# Altium PCB PCB.PcbDoc_2022-03-31.pcbdoc
Units mil, origin at the board's own origin, x right, y up, seen from the top; angles counter-clockwise.
Board outline 1916 x 2710 mil, 2 copper layers (Top Layer, Bottom Layer); 26 components, 38 nets, 144 pads, 24 vias.
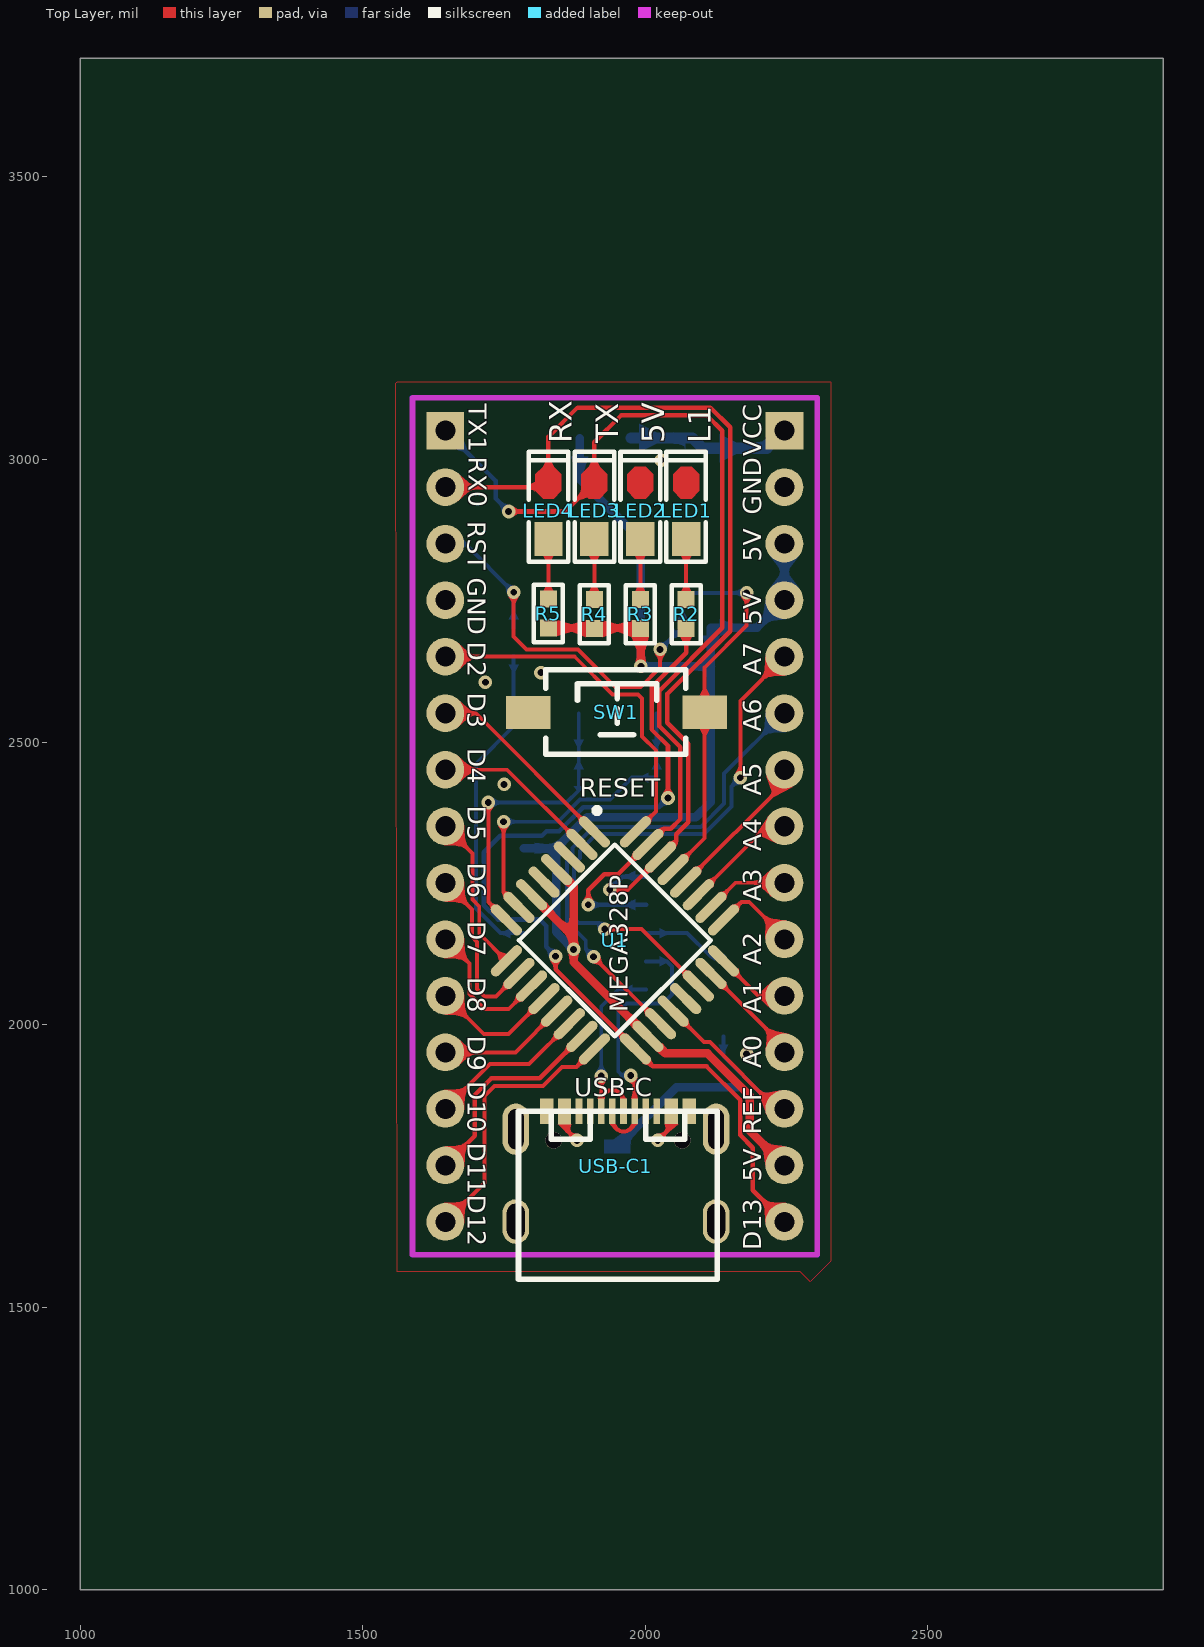
[diagram p0: Top Layer view]
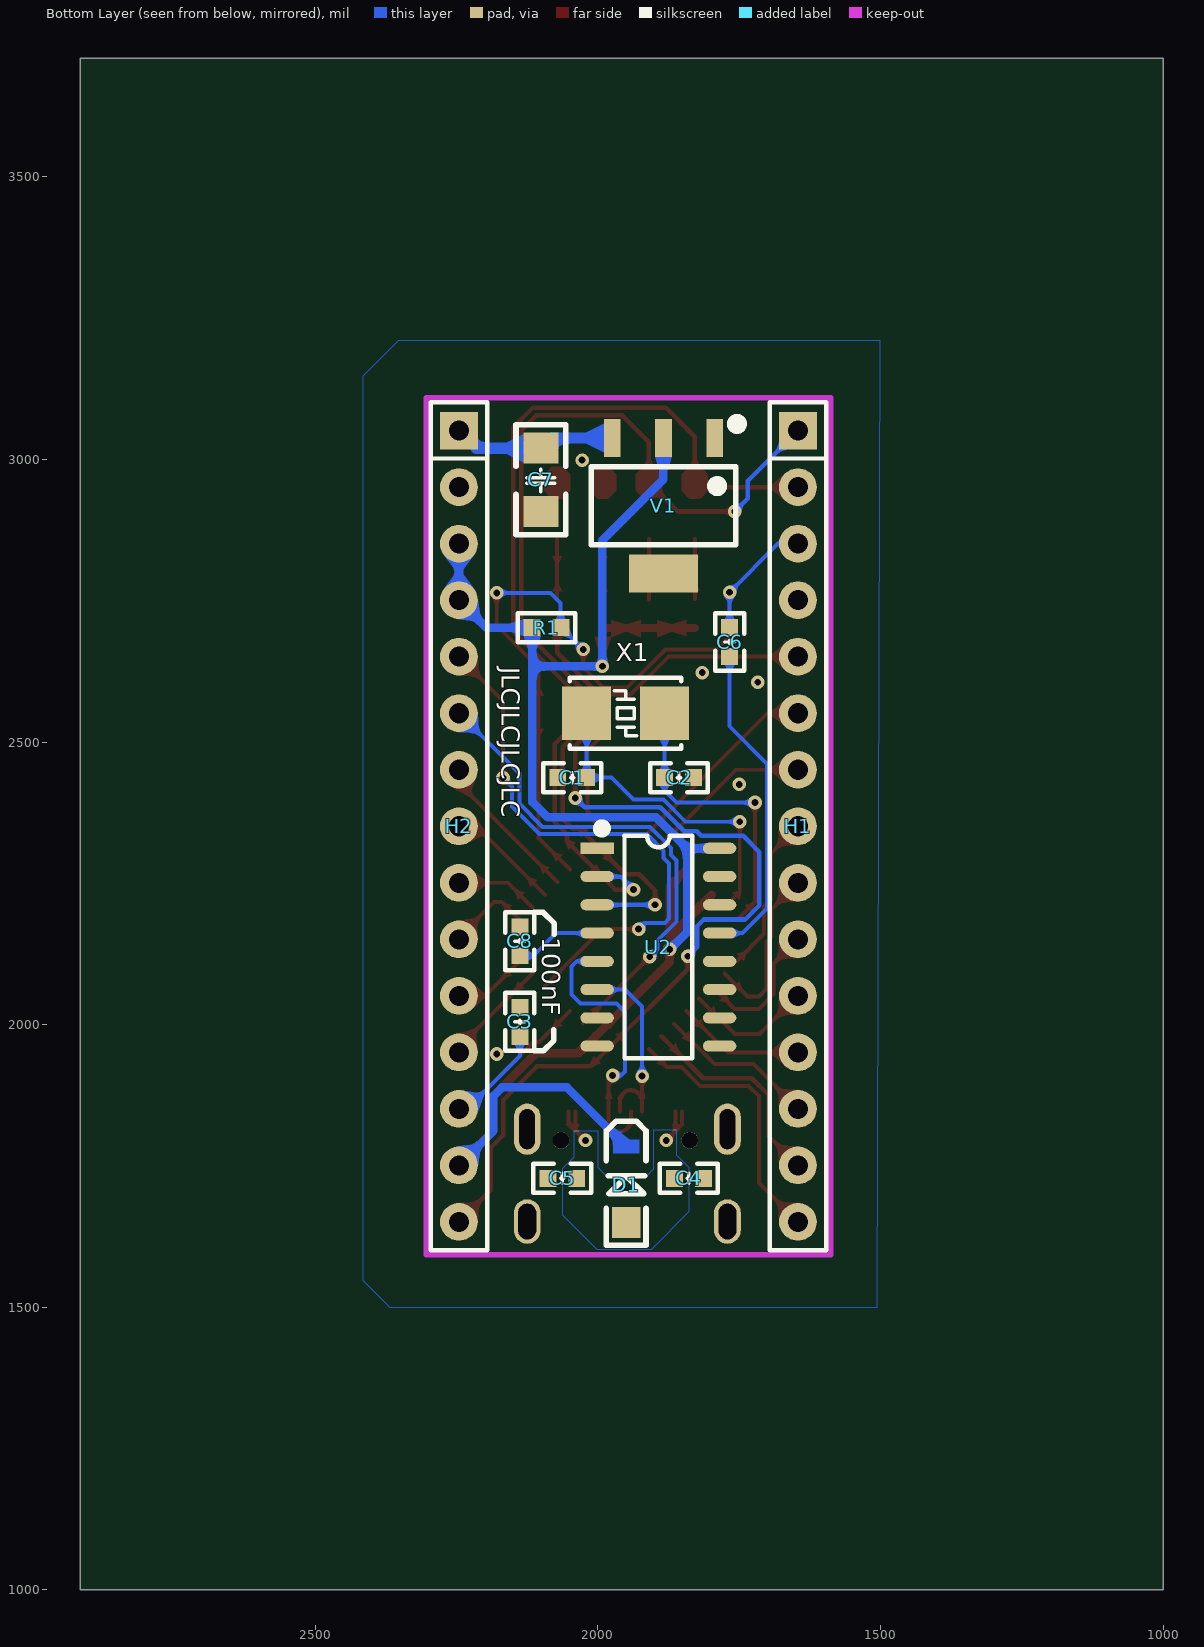
[diagram p1: Bottom Layer view, seen from below]

## Layer stack, top to bottom
Top Layer: signal copper (thickness not stored)
Dielectric: dielectric 12.6, FR-4, Dk 4.8
Bottom Layer: signal copper (thickness not stored)

## Board outline
2916,1000 1000,1000 1000,3710 2916,3710

## Components (designator, comment, footprint, x,y, rotation, side; value= is the part's Value field where it differs from the comment)
C1 "22pF" "C 0603_L" 2045.49,2437 r180 bottom
C2 "22pF" "C 0603_L" 1856.51,2436.99 r0 bottom
C3 "100nF" "C 0603_L" 2138.16,2004.84 r270 bottom
C4 "0.1uF" "C 0603_L" 1839,1728 r0 bottom
C5 "4.7uF" "C 0603_L" 2063,1728 r180 bottom
C6 "100nF" "C 0603_L" 1767,2677 r270 bottom
C7 "10uF" "C 1206_L" 2101,2963 r90 bottom
C8 "100nF" "C 0603_L" 2138.16,2147.43 r270 bottom
D1 "SS26" SOD-123 1950,1717 r90 bottom
H1 "HEADER 1X15" HDR2.54-LI-15P 1646,2351 r270 bottom
H2 "HEADER 1X15" HDR2.54-LI-15P 2246,2351 r270 bottom
LED1 "LED-RED" "LED 0805" 2072.24,2909 r90 top
LED2 "LED-RED" "LED 0805" 1990.98,2909 r90 top
LED3 "LED-BLUE" "LED 0805B" 1909.72,2909 r90 top
LED4 "LED-YELLOW" "LED 0805Y" 1828.46,2909 r90 top
R1 "1K" "R 0603_L" 2091,2702.6 r0 bottom
R2 "1K" "R 0603_L" 2072.24,2726.41 r270 top
R3 "1K" "R 0603_L" 1990.98,2726.41 r270 top
R4 "1K" "R 0603_L" 1909.72,2726.41 r270 top
R5 "1K" "R 0603_L" 1828.46,2727.41 r270 top
SW1 "3x6x5" "TSW SMD-3*6*2.5" 1950,2553 r0 top
U1 "MEGA328P" TQFP32-7*7 1946,2149 r225 top
U2 "CH340C" SOP16_L 1893,2137 r180 bottom
USB-C1 "USB-C" TYPE-C-USB-5 1948,1749 r0 top
V1 "AMS1117-5V" AMS1117 1884,2918 r0 bottom
X1 "16MHz" "OSC 5032-2P" 1951,2551 r0 bottom

## Footprints (in the part's own frame and the unit in brackets; to place one, negate y for a bottom-side part, rotate by r counter-clockwise, add the part's x,y. Pads: shape width x height; smd on the part's side, far side on the other; paste and mask are expansions set on the pad)
AMS1117 [mm]
  rect 0.75x1.7 smd: 1(-2.3,-3.048) 2(0,-3.048) 3(2.3,-3.048)
  rect 3.1x1.7 smd: 4(0,3.048)
  silkscreen extent -3.5,-3.88 3.25,1.75
"C 0603_L" [mil]
  rect 30x30 smd: 1(-25.6,0) 2(25.59,0)
  silkscreen extent -51,-26 51,26
"C 1206_L" [mil]
  rect 55x62 smd: 1(-55.12,0) 2(57.09,0)
  silkscreen extent -96,-44 98,44
HDR2.54-LI-15P [mm]
  rect 1.7x1.7 hole 0.9: 1(-17.78,0)
  round 1.7 hole 0.9: 2(-15.24,0) 3(-12.7,0) 4(-10.16,0) 5(-7.62,0) 6(-5.08,0) 7(-2.54,0) 8(0,0) 9(2.54,0) 10(5.08,0) 11(7.62,0) 12(10.16,0) 13(12.7,0) 14(15.24,0) 15(17.78,0)
  silkscreen extent -19.05,-1.27 19.05,1.27
"LED 0805" [mil]
  rect 60x50 smd: 1(-50,0)
  round 0 smd: 2(50,0)
  Top Layer region: 35.43,23.1 21.9,9.57 21.9,-9.57 35.43,-23.1 64.57,-23.1 78.1,-9.57 78.1,9.57 64.57,23.1
  silkscreen extent -90,-35 105,35
"LED 0805B" [mil]
  rect 60x50 smd: 1(-50,0)
  round 0 smd: 2(50,0)
  Top Layer region: 35.43,23.1 21.9,9.57 21.9,-9.57 35.43,-23.1 64.57,-23.1 78.1,-9.57 78.1,9.57 64.57,23.1
  silkscreen extent -90,-35 105,35
"LED 0805Y" [mil]
  rect 60x50 smd: 1(-50,0)
  round 0 smd: 2(50,0)
  Top Layer region: 35.43,23.1 21.9,9.57 21.9,-9.57 35.43,-23.1 64.57,-23.1 78.1,-9.57 78.1,9.57 64.57,23.1
  silkscreen extent -90,-35 105,35
"OSC 5032-2P" [mm]
  rect 2.2x2.4 smd: 1(-1.75,0) 2(1.75,0)
  silkscreen extent -2.5,-1.6 2.5,1.6
"R 0603_L" [mil]
  rect 30x30 smd: 1(-25.6,0) 2(25.58,0)
  silkscreen extent -51,-26 51,26
SOD-123 [mil]
  rect 55x50 smd: 1(-67.5,0)
  round 0 smd: 2(67.5,0)
  Top Layer region: 55.43,-23.1 55.43,23.1 79.57,23.1 79.57,-23.1
  silkscreen extent -108,-35 112,35
SOP16_L [mm]
  rect 1.5x0.5 smd: 1(-2.752,4.445)
  oval 1.5x0.5 smd: 2(-2.752,3.175) 3(-2.752,1.905) 4(-2.752,0.635) 5(-2.752,-0.635) 6(-2.752,-1.905) 7(-2.752,-3.175) 8(-2.752,-4.445) 9(2.752,-4.445) 10(2.752,-3.175) 11(2.752,-1.905) 12(2.752,-0.635) 13(2.752,0.635) 14(2.752,1.905) 15(2.752,3.175) 16(2.752,4.445)
  silkscreen extent -2.69,-5 1.52,5.49
TQFP32-7*7 [mm]
  oval 0.45x1.8 smd: 1(-2.803,-4.1) 2(-2.003,-4.1) 3(-1.203,-4.1) 4(-0.403,-4.1) 5(0.397,-4.1) 6(1.197,-4.1) 7(1.997,-4.1) 8(2.797,-4.1) 17(2.797,4.1) 18(1.997,4.1) 19(1.197,4.1) 20(0.397,4.1) 21(-0.403,4.1) 22(-1.203,4.1) 23(-2.003,4.1) 24(-2.803,4.1)
  oval 1.8x0.45 smd: 9(4.097,-2.8) 10(4.097,-2) 11(4.097,-1.2) 12(4.097,-0.4) 13(4.097,0.4) 14(4.097,1.2) 15(4.097,2) 16(4.097,2.8) 25(-4.103,2.8) 26(-4.103,2) 27(-4.103,1.2) 28(-4.103,0.4) 29(-4.103,-0.4) 30(-4.103,-1.2) 31(-4.103,-2) 32(-4.103,-2.8)
  silkscreen extent -3.68,-4.82 3.05,3.05
"TSW SMD-3*6*2.5" [mm]
  rect 2x1.5 smd: 1(-3.996,-0.02) 2(3.937,0)
  silkscreen extent -3.21,-1.9 3.09,1.9
TYPE-C-USB-5 [mm]
  oval 1.2x2 hole 0.8 slot 1.6 at 90 deg: 0(-4.5,-2.475) 0(4.5,-2.475)
  oval 1.2x2.3 hole 0.7 slot 1.8 at 90 deg: 0(-4.5,1.675) 0(4.5,1.675)
  rect 0.3x1.15 smd: A1(-3.263,2.473) A4(-2.462,2.471) A5(-1.162,2.475) A6(-0.162,2.475) A7(0.337,2.473) A8(1.337,2.475) A9(2.638,2.475) A12(3.437,2.475) B1(3.138,2.475) B4(2.337,2.475) B5(1.838,2.475) B6(0.838,2.475) B7(-0.663,2.473) B8(-1.663,2.475) B9(-2.162,2.471) B12(-2.963,2.473)
  round 0.75 hole 0.75 unplated: ""(-2.803,1.175) ""(2.977,1.175)
  silkscreen extent -4.38,-5.08 4.56,2.48

## Via types
v1: diameter 24, hole 12, Top Layer to Bottom Layer, tented both sides, 24 vias

## Nets (pads, with @x,y where several pads share a name; then routed paths per layer and width w, separated by ;. In a path a pad name is that pad's centre, name@x,y a point inside that pad or via, vN(x,y) a via of type N, cw(c..) or ccw(c..) an arc to the next point about the centre after c; other vN are vias at no path point)
+5: D1.2 H2.3 H2.4 H2.14 R1.2 R3.2 R4.2 R5.2 U1.4 U1.6 U1.18 U2.16 V1.2 | length 3204.2
  Top Layer w15: U1.6 1873,2155.33 ; R5.2 1989.97,2701.82 R3.2 1992,2699.8 v1(1992,2634) ; U1.4 1873,2244.42 1873,2155.33 ; H2.14@2232.79,1751 H2.14 2185.09,1811.91 2185.09,1873.86 2109.95,1949 2034.78,1949 2004.53,1979.25 1873,2110.79 v1(1873,2133) 1873,2155.33
  Bottom Layer w15: U2.16 1842,2312 ; v1(1873,2133) 1842,2164 1842,2312 ; V1.2 1884,2965 1992,2857 v1(1992,2634) 2115.89,2634 ; D1.2 2054.5,1889 2169.95,1889 2185,1873.96 2185,1812 H2.14 ; H2.3 H2.4 2197.59,2702.59 2115.89,2702.59 2115.89,2634 ; 1842,2312 1897,2367 2089,2367 2115.89,2393.89 2115.89,2634
A0: H2.12 U1.23 | length 193.5
  Top Layer w7: U1.23 2246,1960.5 H2.12
A1: H2.11 U1.24 | length 133.5
  Top Layer w7: U1.24 2200.04,2051 H2.11
A2: H2.10 U1.25 | length 150.9
  Top Layer w7: U1.25 2170.14,2217.25 2183.79,2217.25 2246,2155.04 H2.10
A3: H2.9 U1.26 | length 148.1
  Top Layer w7: U1.26 2159.35,2251 H2.9
A4: H2.8 U1.27 | length 202.6
  Top Layer w7: U1.27 2214.81,2351 H2.8
A5: H2.7 U1.28 | length 271.3
  Top Layer w7: U1.28 2246,2426.73 H2.7
A6: H2.6 U1.19 | length 888.9
  Top Layer w7: v1(1908.33,2120) U1.19
  Bottom Layer w7: v1(1908.33,2120) 1894.5,2133.83 1894.5,2148.5 1861,2182 1861,2290.39 1871,2300.39 1871,2313 1908,2350 2098,2350 2139,2391 2139,2444 H2.6
A7: H2.5 U1.22 | length 997.9
  Top Layer w7: v1(1928,2169) 1992.95,2169 U1.22 ; v1(2168,2437) 2168,2573 H2.5
  Bottom Layer w7: v1(1928,2169) 1917,2180 1881.38,2180 1874,2187.39 1874,2285 1884,2295 1884,2307.61 1913.38,2337 2103.38,2337 2152,2385.61 2152,2421 v1(2168,2437)
AREF: C3.2 H2.13 U1.20 | length 449.6
  Top Layer w7: U1.20 2103.87,1969 2114,1969 2232,1851 H2.13
  Bottom Layer w7: C3.2@2138.16,1979.25 2138.16,1944.84 2232,1851 H2.13
"CH340 D+": U2.5 USB-C1.A6 USB-C1.B6 | length 496.9
  Top Layer w7: USB-C1.A6 1941.6,1830.68 ccw(c1961.29,1830.68) 1961.29,1811 ccw(c1961.29,1830.69) USB-C1.B6@1980.98,1830.69 ; v1(1974,1910) 1980.97,1903.02 USB-C1.B6 USB-C1.B6@1980.97,1830.69
  Bottom Layer w7: v1(1974,1910) 1959,1910 1952,1917 1952,2022 1967,2037 2031,2037 2047,2053 2047,2103 2038,2112 U2.5
"CH340 D-": U2.6 USB-C1.A7 USB-C1.B7 | length 357.2
  Top Layer w7: USB-C1.B7 USB-C1.B7@1921.91,1864.31 ; v1(1921.91,1908.91) USB-C1.B7@1921.91,1864.31 ; USB-C1.A7 1961.28,1864.32 ccw(c1941.61,1864.32) 1941.61,1884 ccw(c1941.61,1864.31) USB-C1.B7@1921.91,1864.31
  Bottom Layer w7: v1(1921.91,1908.91) 1921.91,2031.92 1952,2062 U2.6
D0/RX: H1.2 LED4.2 U1.30 U2.2 | length 1654.1
  Top Layer w8: H1.2 1820.45,2951 LED4.2 1828.45,3040.46 1879.9,3091.9 2114.9,3091.9 2150,3056.8 2150,2696.2 2038.9,2585.1 2038.9,2533.9 2076,2496.8 2076,2358.19 2054.69,2336.87 2054.69,2324.5 U1.30 1969.18,2239 v1(1937,2239)
  Bottom Layer w8: v1(1937,2239) 1960,2262 U2.2
D1/TX: H1.1 LED3.2 U1.31 U2.3 | length 1782.8
  Top Layer w8: v1(1758,2908) 1858.71,2908 LED3.2 1909.71,3030.72 1956.9,3077.9 2109.1,3077.9 2136,3051 2136,2702 2024.9,2590.9 2024.9,2528.1 2029,2524 2062,2491 2062,2363.98 2044.78,2346.77 2032.41,2346.77 U1.31 1951.64,2266 1927,2266 1899,2238 v1(1899,2212)
  Bottom Layer w8: H1.1 1735,2962 1735,2931 v1(1758,2908) ; v1(1899,2212) U2.3
D2: H1.5 U1.32 | length 639.7
  Top Layer w7: H1.5 1875,2651 1942,2584 1987,2584 1994,2577 1994,2510 2018.5,2485.5 2018.5,2377.4 U1.32
D3: H1.6 U1.1 | length 350.8
  Top Layer w7: H1.6 1700.04,2551 U1.1
D4: H1.7 U1.2 | length 296.3
  Top Layer w7: H1.7 1755.5,2451 U1.2
D5: H1.8 U1.9 | length 282.8
  Top Layer w7: H1.8 1694,2303 1694,2221.38 1706,2209.38 1706,2160.87 U1.9
D6: H1.9 U1.10 | length 307.7
  Top Layer w7: H1.9 1693,2204 1693,2155.48 1701.96,2146.52 1701.96,2063.04 1715,2050 1735.64,2050 U1.10
D7: H1.10 U1.11 | length 251.8
  Top Layer w7: H1.10 1688.96,2108.04 1688.96,2054.04 1715,2028 1758.18,2028 U1.11
D8: H1.11 U1.12 | length 229.1
  Top Layer w7: H1.11 1714,1983 1757.72,1983 U1.12
D9: H1.12 U1.13 | length 227.2
  Top Layer w7: H1.12 1770.27,1951 U1.13
D10: H1.13 U1.14 | length 281.7
  Top Layer w7: H1.13 1725,1930 1793.81,1930 U1.14
D11: H1.14 U1.15 | length 391.9
  Top Layer w8: H1.14@1659.35,1751 H1.14 1698,1803 1698,1875.4 1727.59,1905 1813.35,1905 U1.15@1887.61,1979.25
D12: H1.15 U1.16 | length 480.4
  Top Layer w7: H1.15 1715,1720 1715,1873.31 1733.18,1891.5 1818.94,1891.5 1852.44,1925 1877.89,1925 U1.16
D13: H2.15 R2.2 U1.17 | length 1676.2
  Top Layer w8: v1(1841,2121) 1841,2098.25 U1.17 2013.24,1926 2108.21,1926 2167.59,1866.62 2167.59,1804.66 2190,1782.25 2190,1707 H2.15 ; v1(2040,2401) 2040,2493.2 2010.9,2522.3 2010.9,2596.7 2072.23,2658.04 R2.2
  Bottom Layer w8: v1(1841,2121) 1824.5,2137.5 1824.5,2174.5 1813,2186 1739.09,2186 1714.09,2211 1714.09,2305.09 1743,2334 1817,2334 1825,2342 1847.25,2342 1889.75,2384.5 2023.5,2384.5 v1(2040,2401)
GND: C1.1 C2.1 C3.1 C4.1 C5.1 C7.1 C8.1 H1.4 H2.2 LED1.2 LED2.2 SW1.1 U1.3 U1.5 U1.21 U2.1 USB-C1.A1 USB-C1.A12 USB-C1.B1 USB-C1.B12 V1.1
  other v1: 2179,1948 1750,2425 1717,2606 1815.29,2623 2028,2999
NETC1_2: C1.2 U1.7 X1.2 | length 580
  Top Layer w7: v1(1749,2359) 1749,2234.79 U1.7
  Bottom Layer w7: v1(1749,2359) 1845.16,2359 1884.16,2398 1937,2398 1975.99,2437 C1.2 X1.2
NETC2_2: C2.2 U1.8 X1.1 | length 526.6
  Top Layer w7: v1(1722,2393) 1722,2217.25 U1.8
  Bottom Layer w7: v1(1722,2393) 1860.77,2393 1882.1,2414.33 C2.2 X1.1
NETC6_2: C6.2 U2.13 | length 575.6
  Bottom Layer w7: C6.2 1767,2528 1700.5,2461.5 1700.5,2205.5 1744,2162 U2.13
NETC8_2: C8.2 U2.4 | length 153.5
  Bottom Layer w7: U2.4 2074,2162 2114.15,2121.84 C8.2
NETLED1_1: LED1.1 R2.1 | length 107
  Top Layer w7: R2.1 LED1.1
NETLED2_1: LED2.1 R3.1 | length 107
  Top Layer w7: R3.1 LED2.1
NETLED3_1: LED3.1 R4.1 | length 107
  Top Layer w7: R4.1 LED3.1
NETLED4_1: LED4.1 R5.1 | length 106
  Top Layer w7: R5.1 LED4.1
RESET: C6.1 H1.3 R1.1 SW1.2 U1.29 | length 1402.5
  Top Layer w7: v1(1767,2765) 1767,2687 1790,2664 1880.38,2664 1947.38,2597 1991,2597 2026,2632 v1(2026,2663.89) ; U1.29 2105,2330.27 SW1.2 2105,2632.11 2179,2706.11 v1(2179,2764)
  Bottom Layer w7: H1.3 1681,2851 v1(1767,2765) C6.1 ; v1(2026,2663.89) 2066,2703.89 2066,2746.29 2083.7,2764 v1(2179,2764)
VCC: C4.2 C5.2 D1.1 USB-C1.A4 USB-C1.A9 USB-C1.B4 USB-C1.B9 | length 195.2
  Top Layer w7: USB-C1.A4 1851.05,1822.95 1862.86,1811.14 ; USB-C1.B9 1862.86,1811.14 ; v1(1879,1795) 1862.86,1811.14 ; v1(2022,1795) 2040.02,1813.02 ; USB-C1.B4 2040.02,1813.02 ; USB-C1.A9 2051.84,1824.85 2040.02,1813.02
VIN: C7.2 H2.1 V1.3 | length 291.7
  Bottom Layer w20: V1.3 2083.08,3038 C7.2 2215.08,3020.09 H2.1
pads on no net: U2.7 U2.8 U2.9 U2.10 U2.11 U2.12 U2.14 U2.15 USB-C1. USB-C1.0 USB-C1.A5 USB-C1.A8 USB-C1.B5 USB-C1.B8 V1.4

## Polygon pours and split planes (outlines as drawn)
GND on Bottom Layer (solid): 1500,3210 2353,3210 2416,3147 2416,1548 2368,1500 1506,1500
VCC on Bottom Layer (solid): 1861,1770 1839,1748 1839,1669 1906,1602 2001,1602 2062,1663 2062,1746 2042,1766 2042,1812 2000,1812 2000,1748 1984,1732 1914,1732 1901,1745 1901,1814 1861,1814
GND on Top Layer (solid): 1558,3135 1561,3138 2328,3138 2328,1581 2292,1545 2274,1563 1561,1563

## Other copper
Top Layer:
  drawing of 203 lines, arcs and shapes, not listed
Bottom Layer:
  region net D0/RX: 1981.66,2252.16 1981.66,2271.84 1969.66,2266 1969.66,2258
  region net D1/TX: 1981.66,2202.16 1981.66,2221.84 1969.66,2216 1969.66,2208
  region net NETC8_2: 2025.54,2153.25 2025.54,2170.75 2036.04,2165.5 2036.04,2158.5
  region net "CH340 D+": 2025.54,2103.25 2025.54,2120.75 2036.04,2115.5 2036.04,2108.5
  region net "CH340 D-": 1977.15,2053.25 1977.15,2070.75 1966.65,2065.5 1966.65,2058.5
  region net +5: 1804.34,2302.16 1804.34,2321.84 1826.84,2319.5 1826.84,2304.5
  region net NETC6_2: 1760.46,2153.25 1760.46,2170.75 1749.96,2165.5 1749.96,2158.5
  region net +5: 1973.1,1796.57 1943.32,1796.57 1973.96,1819.07 1995.17,1819.07
  region net D1/TX: 1679.47,3031.67 1665.32,3017.53 1678.05,3013.29 1683.71,3018.95
  region net NETC1_2: 2011.15,2452 2028.65,2452 2023.4,2462.5 2016.4,2462.5
  region net NETC1_2: 2004.89,2428.25 2004.89,2445.75 1994.39,2440.5 1994.39,2433.5
  region net NETC2_2: 1873.35,2452 1890.85,2452 1885.6,2462.5 1878.6,2462.5
  region net NETC2_2: 1890.85,2422 1873.35,2422 1878.6,2414.33 1885.6,2414.33
  region net AREF: 2146.91,1964.26 2129.41,1964.26 2134.66,1953.76 2141.66,1953.76
  region net RESET: 1758.25,2717.59 1775.75,2717.59 1770.5,2728.09 1763.5,2728.09
  region net NETC6_2: 1775.75,2636.41 1758.25,2636.41 1763.5,2625.91 1770.5,2625.91
  region net NETC8_2: 2123.16,2113.09 2123.16,2130.59 2114.16,2125.34 2114.16,2118.34
  region net VIN: 2132,3045.09 2132,2995.09 2162,3010.09 2162,3030.09
  region net VIN: 1989.32,3063 1989.32,3013 2019.32,3028 2019.32,3048
  region net +5: 1898.77,3004.53 1869.24,3004.53 1876.5,2982.03 1891.5,2982.03
  region net NETC1_2: 2028.65,2503.76 2011.15,2503.76 2016.4,2493.26 2023.4,2493.26
  region net NETC2_2: 1890.85,2503.76 1873.35,2503.76 1878.6,2493.26 1885.6,2493.26
  region net RESET: 2057.25,2717.6 2074.75,2717.6 2069.5,2728.1 2062.5,2728.1
  region net RESET: 2060.95,2687.6 2050.4,2701.56 2046.49,2689.33 2050.75,2683.69
  region net +5: 2131.58,2717.6 2131.58,2687.6 2154.08,2695.09 2154.08,2710.09
  region net +5: 2131.58,2687.6 2101.58,2687.6 2108.39,2665.1 2123.39,2665.1
  region net D1/TX: 1906.94,2203 1906.94,2221 1915.34,2216 1915.34,2208
  region net D0/RX: 1948.98,2238.25 1936.25,2250.98 1945.73,2253.38 1951.38,2247.73
  region net D1/TX: 1758.75,2919.98 1746.03,2907.25 1743.62,2916.72 1749.28,2922.38
  region net RESET: 2171.07,2755 2171.07,2773 2162.67,2767.5 2162.67,2760.5
  region net +5: 1999.94,2625 1999.94,2643 2008.34,2641.5 2008.34,2626.5
  region net +5: 2001,2641.94 1983,2641.93 1984.5,2650.34 1999.5,2650.34
  region net RESET: 2037.98,2663.14 2025.25,2675.87 2035.08,2677.92 2040.03,2672.97
  region net RESET: 1767.75,2776.98 1755.03,2764.25 1752.98,2774.07 1757.92,2779.03
  region net RESET: 1776,2757.06 1758,2757.07 1763.5,2748.66 1770.5,2748.66
  region net A6: 1909.08,2131.98 1896.36,2119.25 1894.31,2129.08 1899.26,2134.03
  region net A7: 1928.75,2180.98 1916.03,2168.25 1914.53,2177.52 1919.47,2182.48
  region net +5: 1873.75,2144.98 1861.03,2132.25 1856.15,2139.25 1866.75,2149.85
  region net A7: 2168.75,2425.02 2156.03,2437.75 2153.98,2427.93 2158.92,2422.97
  region net D13: 1841.75,2132.98 1829.03,2120.25 1826.62,2129.72 1832.28,2135.38
  region net NETC1_2: 1756.94,2350 1756.94,2368 1765.34,2362.5 1765.34,2355.5
  region net NETC2_2: 1729.94,2384 1729.94,2402 1738.34,2396.5 1738.34,2389.5
  region net D13: 2040.75,2389.02 2028.03,2401.75 2025.62,2392.28 2031.28,2386.62
  region net "CH340 D-": 1930.91,1916.85 1912.91,1916.85 1918.41,1925.25 1925.41,1925.25
  region net "CH340 D+": 1966.07,1901 1966.07,1919 1959,1913.5 1959,1906.5
  region net RESET: 1668.14,2825.9 1668.14,2876.1 1681,2854.5 1681,2847.5
  region net +5: 2271.1,2828.86 2220.9,2828.87 2238.5,2805.44 2253.5,2805.44
  region net +5: 2271.1,2773.14 2220.9,2773.13 2238.5,2796.56 2253.5,2796.56
  region net +5: 2212.61,2753.1 2248.1,2717.6 2219.09,2713.48 2208.48,2724.09
  region net A6: 2212.61,2553.1 2248.1,2517.6 2216.26,2516.31 2211.31,2521.26
  region net AREF: 2240.79,1884.06 2213.86,1841.7 2205.63,1872.42 2209.48,1878.47
  region net +5: 2212.61,1748.9 2248.1,1784.4 2219.09,1788.52 2208.48,1777.91
  region net D1/TX: 1679.34,3012 1677.7,3013.58 1674.76,3016.07 1673.46,3016.98 1672.27,3017.66 1671.2,3018.11 1670.24,3018.33 1669.39,3018.33 1668.65,3018.11 1668.03,3017.66 1679.34,3028.97 1678.89,3028.35 1678.67,3027.61 1678.67,3026.76 1678.89,3025.8 1679.34,3024.73 1680.02,3023.54 1680.93,3022.24 1682.06,3020.82 1685,3017.66
  region net +5: 2214.04,1793.56 2216.04,1791.79 2218.29,1790.22 2220.81,1788.83 2223.58,1787.63 2226.61,1786.63 2229.9,1785.81 2233.45,1785.19 2237.26,1784.76 2241.34,1784.51 2245.67,1784.46 2212.54,1751.33 2212.49,1755.66 2211.81,1763.55 2211.19,1767.1 2210.37,1770.39 2209.37,1773.42 2208.17,1776.19 2206.78,1778.71 2205.21,1780.96 2203.44,1782.96
  region net AREF: 2204.05,1883.9 2205.9,1882.36 2208.04,1881.14 2210.47,1880.24 2213.2,1879.66 2216.23,1879.4 2219.55,1879.45 2223.16,1879.83 2227.07,1880.52 2231.28,1881.53 2235.78,1882.87 2213.94,1841.42 2212.06,1847.61 2201.43,1876.39 2200.64,1877.41
  region net A6: 2205.79,2515.74 2207.13,2517.36 2208.31,2519.39 2209.35,2521.84 2210.24,2524.7 2210.99,2527.99 2211.59,2531.69 2212.36,2540.34 2212.52,2545.29 2212.54,2550.67 2245.67,2517.54 2240.29,2517.52 2226.69,2516.59 2222.99,2515.99 2219.7,2515.24 2216.84,2514.35 2214.39,2513.31 2212.36,2512.13 2210.74,2510.79
  region net +5: 2253.5,2803.69 2253.66,2801.03 2254.14,2798.32 2254.93,2795.56 2256.05,2792.76 2257.48,2789.9 2259.23,2787 2261.3,2784.05 2263.69,2781.05 2266.4,2778 2269.43,2774.9 2222.57,2774.9 2225.6,2778 2230.7,2784.05 2232.77,2787 2234.52,2789.9 2235.95,2792.76 2237.07,2795.56 2237.86,2798.32 2238.34,2801.03 2238.5,2803.69
  region net +5: 2203.44,2719.04 2205.21,2721.04 2206.78,2723.29 2208.17,2725.81 2209.37,2728.58 2210.37,2731.61 2211.19,2734.9 2211.81,2738.45 2212.24,2742.26 2212.49,2746.34 2212.54,2750.67 2245.67,2717.54 2241.34,2717.49 2233.45,2716.81 2229.9,2716.19 2226.61,2715.37 2223.58,2714.37 2220.81,2713.17 2218.29,2711.78 2216.04,2710.21 2214.04,2708.44
  region net +5: 2238.5,2798.31 2238.34,2800.97 2237.86,2803.68 2237.07,2806.44 2235.95,2809.24 2234.52,2812.1 2232.77,2815 2230.7,2817.95 2228.31,2820.95 2225.6,2824 2222.57,2827.1 2269.43,2827.1 2266.4,2824 2261.3,2817.95 2259.23,2815 2257.48,2812.1 2256.05,2809.24 2254.93,2806.44 2254.14,2803.68 2253.66,2800.97 2253.5,2798.31
  region net VIN: 2192.66,3030.09 2196.47,3030.19 2199.88,3030.49 2202.89,3030.99 2205.51,3031.69 2207.72,3032.59 2209.53,3033.69 2210.94,3034.99 2211.95,3036.49 2212.56,3038.19 2212.78,3040.09 2212.66,3017.66 2192.66,3010.09
  region net +5: 2108.39,2672.72 2108.32,2675.57 2108.12,2678.12 2107.79,2680.37 2107.32,2682.32 2106.72,2683.97 2105.98,2685.32 2105.12,2686.37 2104.11,2687.12 2102.98,2687.57 2101.71,2687.72 2130.89,2687.72 2129.46,2687.57 2128.19,2687.12 2127.06,2686.37 2126.09,2685.32 2125.26,2683.97 2124.59,2682.32 2124.06,2680.37 2123.69,2678.12 2123.46,2675.57 2123.39,2672.72
  region net +5: 2146.47,2695.09 2143.62,2695.02 2141.07,2694.8 2138.82,2694.43 2136.87,2693.91 2135.22,2693.25 2133.87,2692.44 2132.82,2691.48 2132.07,2690.37 2131.62,2689.12 2131.47,2687.72 2131.47,2717.48 2131.62,2716.08 2132.07,2714.82 2132.82,2713.71 2133.87,2712.75 2135.22,2711.94 2136.87,2711.28 2138.82,2710.76 2141.07,2710.39 2143.62,2710.17 2146.47,2710.09
  region net RESET: 2069.5,2724.48 2069.53,2723.13 2069.64,2721.92 2069.82,2720.85 2070.06,2719.92 2070.38,2719.14 2070.76,2718.5 2071.22,2718 2071.74,2717.64 2072.34,2717.43 2073,2717.36 2059,2717.36 2059.66,2717.43 2060.26,2717.64 2060.78,2718 2061.24,2718.5 2061.62,2719.14 2061.94,2719.92 2062.18,2720.85 2062.36,2721.92 2062.47,2723.13 2062.5,2724.48
  region net RESET: 2045.58,2688.41 2046.94,2689.83 2049.1,2692.37 2049.9,2693.51 2050.5,2694.54 2050.91,2695.49 2051.13,2696.33 2051.16,2697.09 2051,2697.75 2050.65,2698.31 2059.73,2687.84 2059.23,2688.25 2058.62,2688.46 2057.9,2688.47 2057.07,2688.27 2056.14,2687.87 2055.09,2687.26 2053.94,2686.44 2052.68,2685.42 2049.83,2682.77
  region net NETC2_2: 1878.6,2415.12 1878.57,2416.45 1878.46,2417.64 1878.29,2418.69 1878.04,2419.6 1877.73,2420.37 1877.34,2421 1876.89,2421.49 1876.36,2421.84 1875.77,2422.05 1875.1,2422.12 1889.1,2422.12 1888.44,2422.05 1887.84,2421.84 1887.32,2421.49 1886.86,2421 1886.48,2420.37 1886.16,2419.6 1885.92,2418.69 1885.74,2417.64 1885.64,2416.45 1885.6,2415.12
  region net NETC2_2: 1885.6,2458.88 1885.64,2457.52 1885.74,2456.31 1885.92,2455.25 1886.16,2454.32 1886.48,2453.54 1886.86,2452.9 1887.32,2452.4 1887.84,2452.04 1888.44,2451.83 1889.1,2451.76 1875.1,2451.76 1875.77,2451.83 1876.36,2452.04 1876.89,2452.4 1877.34,2452.9 1877.73,2453.54 1878.04,2454.32 1878.29,2455.25 1878.46,2456.31 1878.57,2457.52 1878.6,2458.88
  region net NETC1_2: 2023.4,2458.88 2023.43,2457.55 2023.54,2456.36 2023.71,2455.31 2023.96,2454.4 2024.27,2453.63 2024.66,2453 2025.11,2452.51 2025.64,2452.16 2026.23,2451.95 2026.9,2451.88 2012.9,2451.88 2013.56,2451.95 2014.16,2452.16 2014.68,2452.51 2015.14,2453 2015.52,2453.63 2015.84,2454.4 2016.08,2455.31 2016.26,2456.36 2016.36,2457.55 2016.4,2458.88
  region net NETC1_2: 1998.02,2440.5 1999.37,2440.53 2000.58,2440.64 2001.65,2440.81 2002.57,2441.06 2003.36,2441.37 2004,2441.76 2004.5,2442.21 2004.85,2442.74 2005.07,2443.33 2005.14,2444 2005.14,2430 2005.07,2430.66 2004.85,2431.26 2004.5,2431.78 2004,2432.24 2003.36,2432.62 2002.57,2432.94 2001.65,2433.18 2000.58,2433.36 1999.37,2433.46 1998.02,2433.5
  region net NETC6_2: 1763.5,2629.53 1763.47,2630.89 1763.36,2632.1 1763.19,2633.16 1762.94,2634.09 1762.63,2634.87 1762.24,2635.51 1761.79,2636.01 1761.26,2636.37 1760.67,2636.58 1760,2636.65 1774,2636.65 1773.34,2636.58 1772.74,2636.37 1772.22,2636.01 1771.76,2635.51 1771.38,2634.87 1771.06,2634.09 1770.82,2633.16 1770.64,2632.1 1770.54,2630.89 1770.5,2629.53
  region net RESET: 1770.5,2724.47 1770.54,2723.12 1770.64,2721.91 1770.82,2720.84 1771.06,2719.92 1771.38,2719.13 1771.76,2718.49 1772.21,2717.99 1772.74,2717.64 1773.34,2717.43 1774,2717.35 1760,2717.35 1760.66,2717.43 1761.26,2717.64 1761.79,2717.99 1762.24,2718.49 1762.62,2719.13 1762.94,2719.92 1763.18,2720.84 1763.36,2721.91 1763.46,2723.12 1763.5,2724.47
  region net NETC2_2: 1878.6,2496.88 1878.57,2498.23 1878.46,2499.44 1878.29,2500.51 1878.04,2501.43 1877.73,2502.22 1877.34,2502.86 1876.89,2503.36 1876.36,2503.71 1875.77,2503.92 1875.1,2504 1889.1,2504 1888.44,2503.92 1887.84,2503.71 1887.32,2503.36 1886.86,2502.86 1886.48,2502.22 1886.16,2501.43 1885.92,2500.51 1885.74,2499.44 1885.64,2498.23 1885.6,2496.88
  region net NETC1_2: 2016.4,2496.88 2016.36,2498.23 2016.26,2499.44 2016.08,2500.51 2015.84,2501.43 2015.52,2502.22 2015.14,2502.86 2014.68,2503.36 2014.16,2503.71 2013.56,2503.92 2012.9,2504 2026.9,2504 2026.23,2503.92 2025.64,2503.71 2025.11,2503.36 2024.66,2502.86 2024.27,2502.22 2023.96,2501.43 2023.71,2500.51 2023.54,2499.44 2023.43,2498.23 2023.4,2496.88
  region net VIN: 2151.88,3010.09 2148.08,3009.99 2144.68,3009.69 2141.68,3009.19 2139.08,3008.49 2136.88,3007.59 2135.08,3006.49 2133.68,3005.19 2132.68,3003.69 2132.08,3001.99 2131.88,3000.09 2131.88,3040.09 2132.08,3038.19 2132.68,3036.49 2133.68,3034.99 2135.08,3033.69 2136.88,3032.59 2139.08,3031.69 2141.68,3030.99 2144.68,3030.49 2148.08,3030.19 2151.88,3030.09
  region net VIN: 2050.12,3048 2070.12,3047.47 2070.24,3018 2070.03,3019.9 2069.42,3021.6 2068.41,3023.1 2067,3024.4 2065.19,3025.5 2062.98,3026.4 2060.36,3027.1 2057.35,3027.6 2053.94,3027.9 2050.12,3028
  region net AREF: 2134.66,1957.38 2134.63,1958.73 2134.52,1959.94 2134.35,1961.01 2134.1,1961.93 2133.79,1962.72 2133.4,1963.36 2132.95,1963.85 2132.42,1964.21 2131.83,1964.42 2131.16,1964.5 2145.16,1964.5 2144.5,1964.42 2143.9,1964.21 2143.38,1963.85 2142.92,1963.36 2142.54,1962.72 2142.22,1961.93 2141.98,1961.01 2141.8,1959.94 2141.7,1958.73 2141.66,1957.38
  region net NETC8_2: 2116.28,2125.34 2117.61,2125.38 2118.8,2125.48 2119.85,2125.66 2120.76,2125.9 2121.53,2126.22 2122.16,2126.6 2122.65,2127.06 2123,2127.58 2123.21,2128.18 2123.28,2128.84 2123.28,2114.84 2123.21,2115.51 2123,2116.1 2122.65,2116.63 2122.16,2117.08 2121.53,2117.47 2120.76,2117.78 2119.85,2118.03 2118.8,2118.2 2117.61,2118.31 2116.28,2118.34
  region net +5: 1876.5,2989.66 1876.43,2992.51 1876.21,2995.06 1875.86,2997.31 1875.36,2999.26 1874.71,3000.91 1873.93,3002.26 1873,3003.31 1871.93,3004.06 1870.71,3004.51 1869.36,3004.66 1898.64,3004.66 1897.29,3004.51 1896.07,3004.06 1895,3003.31 1894.07,3002.26 1893.29,3000.91 1892.64,2999.26 1892.14,2997.31 1891.79,2995.06 1891.57,2992.51 1891.5,2989.66
  region net VIN: 2009.2,3028 2005.37,3027.9 2001.95,3027.6 1998.93,3027.1 1996.32,3026.4 1994.11,3025.5 1992.29,3024.4 1990.89,3023.1 1989.88,3021.6 1989.28,3019.9 1989.08,3018 1989.08,3058 1989.28,3056.1 1989.88,3054.4 1990.89,3052.9 1992.29,3051.6 1994.11,3050.5 1996.32,3049.6 1998.93,3048.9 2001.95,3048.4 2005.37,3048.1 2009.2,3048
  region net NETC6_2: 1748.75,2165.5 1750.08,2165.54 1751.32,2165.64 1752.46,2165.82 1753.52,2166.06 1754.48,2166.38 1755.36,2166.76 1756.15,2167.22 1756.84,2167.75 1757.44,2168.34 1757.96,2169.01 1757.96,2154.99 1757.44,2155.66 1756.84,2156.25 1756.15,2156.78 1755.36,2157.24 1754.48,2157.62 1753.52,2157.94 1752.46,2158.18 1751.32,2158.36 1750.08,2158.46 1748.75,2158.5
  region net +5: 1825.61,2304.5 1822.74,2304.48 1810.75,2303.69 1809.63,2303.44 1808.75,2303.16 1808.13,2302.84 1808.13,2321.16 1808.75,2320.84 1809.63,2320.56 1810.75,2320.31 1812.12,2320.1 1815.62,2319.77 1822.74,2319.52 1825.61,2319.5
  region net "CH340 D-": 1965.44,2065.5 1966.77,2065.53 1968.01,2065.64 1969.16,2065.82 1970.21,2066.06 1971.18,2066.38 1972.05,2066.76 1972.84,2067.22 1973.53,2067.75 1974.14,2068.34 1974.65,2069.01 1974.65,2054.99 1974.14,2055.66 1973.53,2056.25 1972.84,2056.78 1972.05,2057.24 1971.18,2057.62 1970.21,2057.94 1969.16,2058.18 1968.01,2058.36 1966.77,2058.46 1965.44,2058.5
  region net "CH340 D+": 2037.25,2108.5 2035.92,2108.46 2034.68,2108.36 2033.54,2108.18 2032.48,2107.94 2031.52,2107.62 2030.64,2107.24 2029.85,2106.78 2029.16,2106.25 2028.56,2105.66 2028.04,2104.99 2028.04,2119.01 2028.56,2118.34 2029.16,2117.75 2029.85,2117.22 2030.64,2116.76 2031.52,2116.38 2032.48,2116.06 2033.54,2115.82 2034.68,2115.64 2035.92,2115.54 2037.25,2115.5
  region net NETC8_2: 2037.25,2158.5 2035.92,2158.46 2034.68,2158.36 2033.54,2158.18 2032.48,2157.94 2031.52,2157.62 2030.64,2157.24 2029.85,2156.78 2029.16,2156.25 2028.56,2155.66 2028.04,2154.99 2028.04,2169.01 2028.56,2168.34 2029.16,2167.75 2029.85,2167.22 2030.64,2166.76 2031.52,2166.38 2032.48,2166.06 2033.54,2165.82 2034.68,2165.64 2035.92,2165.54 2037.25,2165.5
  region net D1/TX: 1964.64,2216 1966.84,2216.04 1970.54,2216.35 1972.04,2216.62 1973.31,2216.98 1974.35,2217.4 1975.16,2217.91 1975.74,2218.5 1976.09,2219.16 1976.2,2219.9 1976.2,2204.1 1976.09,2204.84 1975.74,2205.5 1975.16,2206.09 1974.35,2206.6 1973.31,2207.03 1972.04,2207.38 1970.54,2207.65 1968.8,2207.84 1966.84,2207.96 1964.64,2208
  region net D0/RX: 1964.64,2266 1966.84,2266.04 1970.54,2266.35 1972.04,2266.62 1973.31,2266.98 1974.35,2267.4 1975.16,2267.91 1975.74,2268.5 1976.09,2269.16 1976.2,2269.9 1976.2,2254.1 1976.09,2254.84 1975.74,2255.5 1975.16,2256.09 1974.35,2256.6 1973.31,2257.02 1972.04,2257.38 1970.54,2257.65 1968.8,2257.84 1966.84,2257.96 1964.64,2258
  region net +5: 1985.49,1809.38 1982.62,1806.4 1978.07,1801.02 1976.4,1798.62 1975.13,1796.4 1974.26,1794.38 1973.78,1792.54 1973.71,1790.89 1974.04,1789.43 1974.76,1788.17 1956.17,1811.76 1957.19,1810.79 1958.41,1810.23 1959.82,1810.07 1961.43,1810.31 1963.24,1810.97 1965.24,1812.03 1967.44,1813.49 1969.84,1815.36 1972.43,1817.64 1975.21,1820.32
  region net "CH340 D-": 1925.41,1927.59 1925.46,1926.54 1925.61,1925.49 1925.86,1924.46 1926.2,1923.43 1926.64,1922.41 1927.18,1921.41 1927.82,1920.41 1928.55,1919.43 1929.38,1918.45 1930.32,1917.48 1913.52,1917.48 1914.45,1918.45 1915.28,1919.43 1916.01,1920.41 1916.65,1921.41 1917.19,1922.41 1917.63,1923.43 1917.97,1924.46 1918.22,1925.49 1918.37,1926.54 1918.41,1927.59
  region net D13: 2024.08,2390.74 2024.84,2391.56 2025.51,2392.42 2026.11,2393.32 2026.62,2394.27 2027.05,2395.26 2027.4,2396.3 2027.67,2397.38 2027.86,2398.5 2027.97,2399.67 2028,2400.88 2039.88,2389 2038.67,2388.97 2037.5,2388.86 2036.38,2388.67 2035.3,2388.4 2034.26,2388.05 2033.27,2387.62 2032.32,2387.11 2031.42,2386.51 2030.56,2385.84 2029.74,2385.08
  region net NETC2_2: 1740.68,2389.5 1739.62,2389.45 1738.58,2389.3 1737.54,2389.06 1736.51,2388.72 1735.5,2388.28 1734.49,2387.74 1733.5,2387.1 1732.51,2386.36 1731.54,2385.53 1730.57,2384.6 1730.57,2401.4 1731.54,2400.47 1732.51,2399.64 1733.5,2398.9 1734.49,2398.26 1735.5,2397.72 1736.51,2397.28 1737.54,2396.94 1738.58,2396.7 1739.62,2396.55 1740.68,2396.5
  region net NETC1_2: 1767.68,2355.5 1766.62,2355.45 1765.58,2355.3 1764.54,2355.06 1763.51,2354.72 1762.5,2354.28 1761.49,2353.74 1760.5,2353.1 1759.51,2352.36 1758.54,2351.53 1757.57,2350.6 1757.57,2367.4 1758.54,2366.47 1759.51,2365.64 1760.5,2364.9 1761.49,2364.26 1762.5,2363.72 1763.51,2363.28 1764.54,2362.94 1765.58,2362.7 1766.62,2362.55 1767.68,2362.5
  region net D13: 1830.74,2136.92 1831.56,2136.16 1832.42,2135.49 1833.32,2134.89 1834.27,2134.38 1835.26,2133.95 1836.3,2133.6 1837.38,2133.33 1838.5,2133.14 1839.67,2133.03 1840.88,2133 1829,2121.12 1828.97,2122.33 1828.86,2123.5 1828.67,2124.62 1828.4,2125.7 1828.05,2126.74 1827.62,2127.73 1827.11,2128.68 1826.51,2129.58 1825.84,2130.44 1825.08,2131.26
  region net A7: 2152.32,2426.27 2153.03,2427.05 2153.67,2427.89 2154.22,2428.8 2154.71,2429.77 2155.11,2430.8 2155.44,2431.89 2155.7,2433.04 2155.88,2434.26 2155.98,2435.54 2156,2436.88 2167.88,2425 2166.54,2424.98 2165.26,2424.88 2164.04,2424.7 2162.89,2424.44 2161.8,2424.11 2160.77,2423.71 2159.8,2423.22 2158.89,2422.67 2158.05,2422.03 2157.27,2421.32
  region net +5: 1866.59,2150.02 1867.56,2149.06 1871.27,2145.8 1871.78,2145.45 1872.23,2145.2 1872.59,2145.05 1872.88,2145 1861,2133.12 1860.95,2133.41 1860.8,2133.77 1860.55,2134.22 1860.2,2134.73 1859.75,2135.32 1858.55,2136.73 1855.98,2139.41
  region net A7: 1919.47,2182.47 1920.03,2181.93 1921.78,2180.4 1922.11,2180.17 1922.39,2180.01 1922.63,2179.91 1922.82,2179.87 1922.97,2179.9 1917.1,2174.03 1917.13,2174.18 1917.09,2174.37 1916.99,2174.61 1916.83,2174.89 1916.6,2175.22 1916.31,2175.59 1915.55,2176.47 1914.53,2177.53
  region net A6: 1897.6,2135.68 1898.38,2134.97 1899.22,2134.33 1900.13,2133.78 1901.1,2133.29 1902.13,2132.89 1903.22,2132.56 1904.37,2132.3 1905.59,2132.12 1906.87,2132.02 1908.21,2132 1896.33,2120.12 1896.31,2121.46 1896.21,2122.74 1896.03,2123.96 1895.78,2125.11 1895.45,2126.2 1895.04,2127.23 1894.56,2128.2 1894,2129.11 1893.36,2129.95 1892.65,2130.73
  region net RESET: 1763.5,2746.32 1763.45,2747.38 1763.3,2748.42 1763.06,2749.46 1762.72,2750.49 1762.28,2751.5 1761.74,2752.51 1761.1,2753.5 1760.36,2754.49 1759.53,2755.46 1758.6,2756.43 1775.4,2756.43 1774.47,2755.46 1773.64,2754.49 1772.9,2753.5 1772.26,2752.51 1771.72,2751.5 1771.28,2750.49 1770.94,2749.46 1770.7,2748.42 1770.55,2747.38 1770.5,2746.32
  region net RESET: 1756.27,2780.68 1757.05,2779.97 1757.89,2779.33 1758.8,2778.78 1759.77,2778.29 1760.8,2777.89 1761.89,2777.56 1763.04,2777.3 1764.26,2777.12 1765.54,2777.02 1766.88,2777 1755,2765.12 1754.98,2766.46 1754.88,2767.74 1754.7,2768.96 1754.44,2770.11 1754.11,2771.2 1753.71,2772.23 1753.22,2773.2 1752.67,2774.11 1752.03,2774.95 1751.32,2775.73
  region net RESET: 2041.68,2674.62 2040.97,2673.84 2040.33,2672.99 2039.78,2672.09 2039.29,2671.12 2038.89,2670.09 2038.56,2669 2038.3,2667.84 2038.12,2666.63 2038.02,2665.35 2038,2664.01 2026.12,2675.89 2027.46,2675.91 2028.74,2676.01 2029.96,2676.19 2031.11,2676.44 2032.2,2676.77 2033.23,2677.18 2034.2,2677.66 2035.11,2678.22 2035.95,2678.86 2036.73,2679.57
  region net +5: 1999.5,2650.57 1999.51,2649.21 1999.82,2644.27 1999.94,2643.66 2000.08,2643.17 2000.23,2642.81 2000.4,2642.57 1983.6,2642.57 1983.77,2642.81 1983.92,2643.17 1984.06,2643.66 1984.18,2644.27 1984.28,2645.01 1984.42,2646.86 1984.5,2650.57
  region net +5: 2008.57,2626.5 2007.21,2626.49 2002.27,2626.18 2001.66,2626.06 2001.17,2625.92 2000.81,2625.77 2000.57,2625.6 2000.57,2642.4 2000.81,2642.23 2001.17,2642.08 2001.66,2641.94 2002.27,2641.82 2003.01,2641.72 2004.86,2641.58 2008.57,2641.5
  region net RESET: 2160.32,2767.5 2161.38,2767.55 2162.42,2767.7 2163.46,2767.94 2164.49,2768.28 2165.5,2768.72 2166.51,2769.26 2167.5,2769.9 2168.49,2770.64 2169.46,2771.47 2170.43,2772.4 2170.43,2755.6 2169.46,2756.53 2168.49,2757.36 2167.5,2758.1 2166.51,2758.74 2165.5,2759.28 2164.49,2759.72 2163.46,2760.06 2162.42,2760.3 2161.38,2760.45 2160.32,2760.5
  region net D1/TX: 1747.74,2923.92 1748.56,2923.16 1749.42,2922.49 1750.32,2921.89 1751.27,2921.38 1752.26,2920.95 1753.3,2920.6 1754.38,2920.33 1755.5,2920.14 1756.67,2920.03 1757.88,2920 1746,2908.12 1745.97,2909.33 1745.86,2910.5 1745.67,2911.62 1745.4,2912.7 1745.05,2913.74 1744.62,2914.73 1744.11,2915.68 1743.51,2916.58 1742.84,2917.44 1742.08,2918.26
  region net D0/RX: 1952.92,2249.26 1952.16,2248.44 1951.49,2247.58 1950.89,2246.68 1950.38,2245.73 1949.95,2244.74 1949.6,2243.7 1949.33,2242.62 1949.14,2241.5 1949.03,2240.33 1949,2239.12 1937.12,2251 1938.33,2251.03 1939.5,2251.14 1940.62,2251.33 1941.7,2251.6 1942.74,2251.95 1943.73,2252.38 1944.68,2252.89 1945.58,2253.49 1946.44,2254.16 1947.26,2254.92
  region net D1/TX: 1917.51,2208 1916.4,2207.96 1915.31,2207.82 1914.25,2207.6 1913.22,2207.3 1912.21,2206.9 1911.23,2206.42 1910.28,2205.84 1909.35,2205.18 1908.45,2204.44 1907.57,2203.6 1907.57,2220.4 1908.45,2219.56 1909.35,2218.82 1910.28,2218.16 1911.23,2217.58 1912.21,2217.1 1913.22,2216.7 1914.25,2216.4 1915.31,2216.18 1916.4,2216.04 1917.51,2216
  region net +5: 2108.39,2656.5 2108.24,2653.65 2107.79,2651.1 2107.04,2648.85 2105.99,2646.9 2104.64,2645.25 2102.99,2643.9 2101.04,2642.85 2098.79,2642.1 2096.24,2641.65 2093.39,2641.5 2093.39,2626.5 2096.24,2626.35 2098.79,2625.9 2101.04,2625.15 2102.99,2624.1 2104.64,2622.75 2105.99,2621.1 2107.04,2619.15 2107.79,2616.9 2108.24,2614.35 2108.39,2611.5 2123.39,2634
  region net +5: 1849.5,2330.11 1847.33,2328.09 1845.08,2326.29 1842.74,2324.7 1840.31,2323.32 1837.8,2322.15 1835.19,2321.2 1832.5,2320.45 1829.72,2319.92 1826.85,2319.61 1823.89,2319.5 1819.5,2304.5 1822.35,2304.35 1824.9,2303.9 1827.15,2303.15 1829.1,2302.1 1830.75,2300.75 1832.1,2299.1 1833.15,2297.15 1833.9,2294.9 1834.35,2292.35 1834.5,2289.5 1849.5,2293.89 1849.61,2296.85 1849.92,2299.72 1850.45,2302.5 1851.2,2305.19 1852.15,2307.8 1853.32,2310.31 1854.7,2312.74 1856.29,2315.08 1858.09,2317.33 1860.11,2319.5

## Silkscreen, mask and mechanical layers (free items; w line width, h text height)
Top Overlay:
  text "TX1" at 1687.79,3099 h32 r270
  text "RX" at 1869.79,3029 h40 r90
  text "TX" at 1951.79,3029 h40 r90
  text "5V" at 2033.79,3029 h40 r90
  text "L1" at 2115.79,3029 h40 r90
  text "VCC" at 2205,3006 h32 r90
  text "RX0" at 1687,3005 h32 r270
  text "GND" at 2205,2902 h32 r90
  text "RST" at 1686,2891 h32 r270
  text "5V" at 2205,2819 h32 r90
  text "GND" at 1686,2791 h32 r270
  text "5V" at 2205,2707 h32 r90
  text "D2" at 1686,2677.23 h32 r270
  text "A7" at 2205,2618 h32 r90
  text "D3" at 1686,2587 h32 r270
  text "A6" at 2205,2518 h32 r90
  text "D4" at 1686,2489 h32 r270
  text "A5" at 2205,2405 h32 r90
  text "RESET" at 1883.79,2403 h32
  text "D5" at 1686,2387 h32 r270
  text "A4" at 2205,2307 h32 r90
  text "D6" at 1686,2286 h32 r270
  text "A3" at 2205,2217 h32 r90
  text "D7" at 1686,2183 h32 r270
  text "A2" at 2205,2105 h32 r90
  text "D8" at 1686,2084 h32 r270
  text "MEGA328P" at 1969,2022 h32 r90
  text "A1" at 2205,2019 h32 r90
  text "D9" at 1686,1980 h32 r270
  text "A0" at 2205,1923 h32 r90
  text "D10" at 1686,1900 h32 r270
  text "USB-C" at 1873.79,1873 h32
  text "REF" at 2205,1805 h32 r90
  text "D11" at 1686,1791 h32 r270
  text "5V" at 2205,1722 h32 r90
  text "D12" at 1686,1699 h32 r270
  text "D13" at 2205,1601 h32 r90
Bottom Overlay:
  lines w10: 2077,2160 2077,2179 2096.61,2198.61 2112.57,2198.61 ; 2078,1991 2078,1972 2096.33,1953.66 2112.57,1953.66
  text "JLCJLCJLCJLC" at 2170,2632 h31.5 r90
  text "100nF" at 2098.57,2155 h32 r90
Mechanical 1:
  lines w10: 1588,1593 2304,1593 2304,3109 1588,3109 1588,1593
Document:
  lines w10: 1588,1593 2304,1593 2304,3109 1588,3109 1588,1593